# EAGLE board GrapherBlanK7_production (EAGLE 5.10)
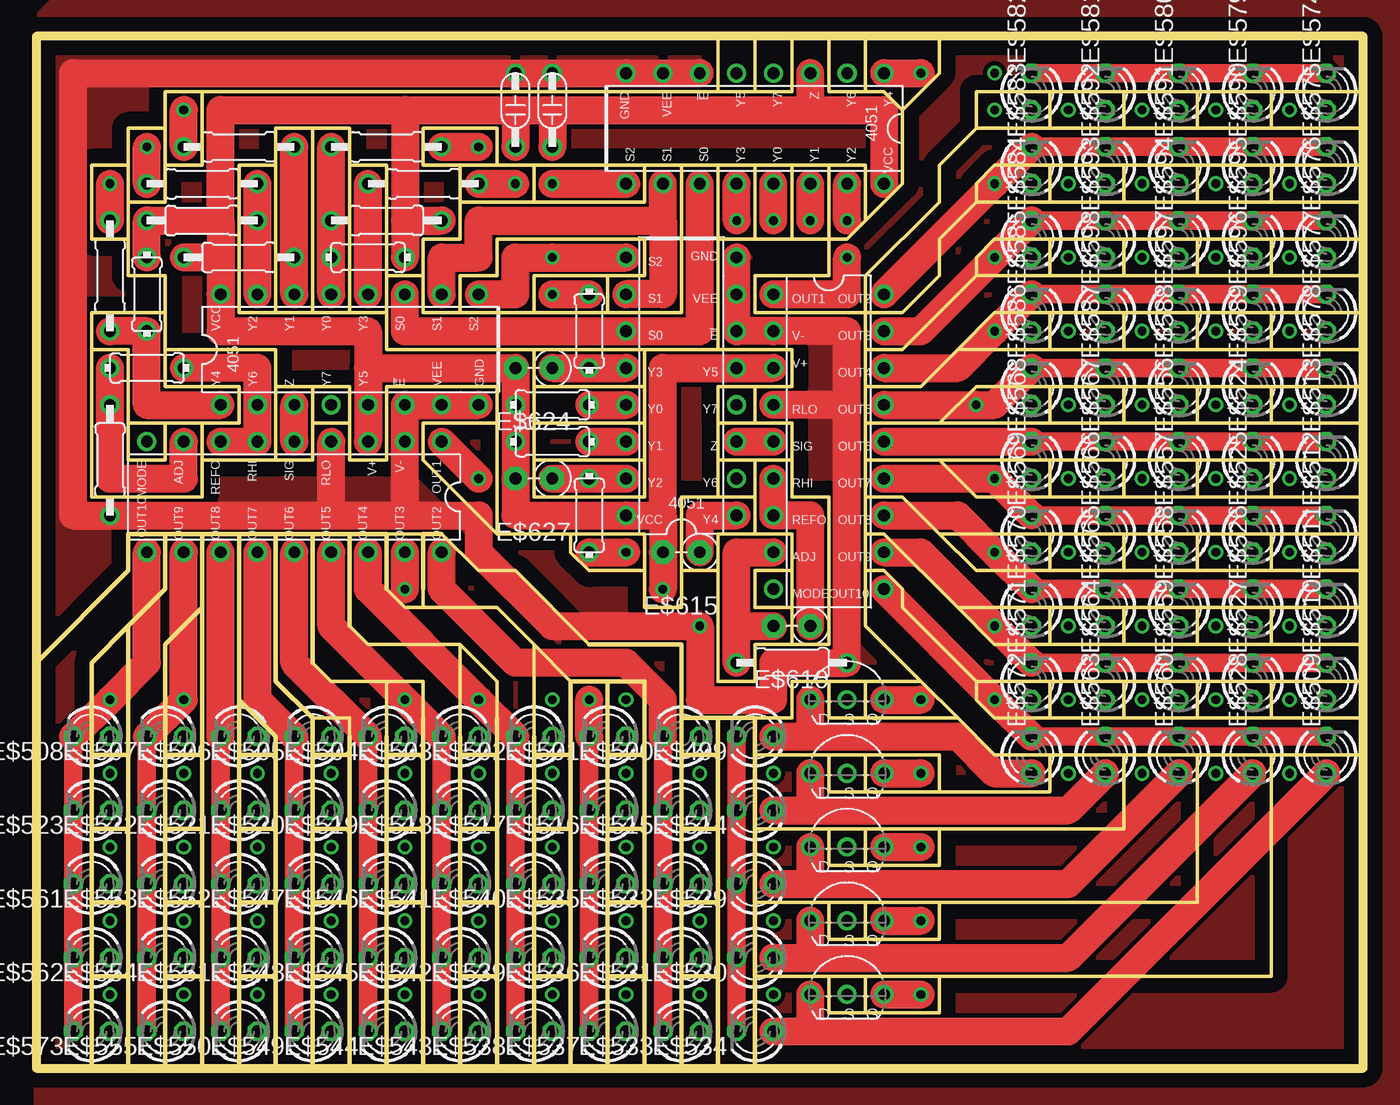
[diagram p0: board, top side]
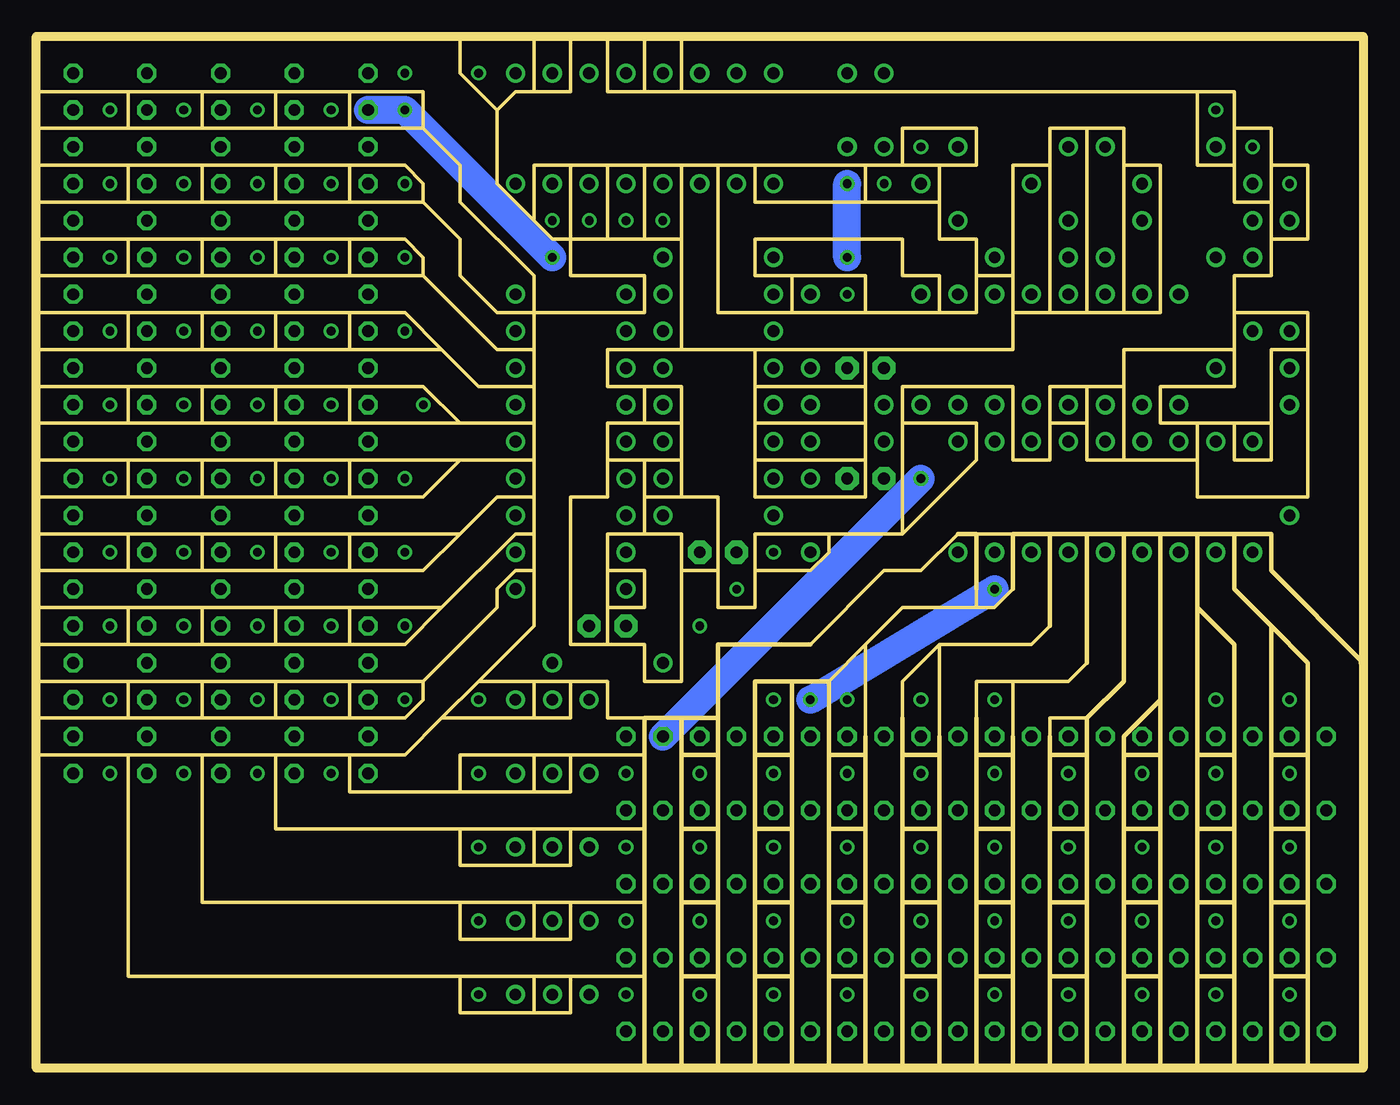
[diagram p1: board, bottom side, seen from below]

Size 91.44 x 71.12 mm. Coordinates in mm from the lower left corner, seen from the top.
Outline: 91.44,21.59 91.44,0 49.53,0
Outline: 91.44,21.59 91.44,24.13
Outline: 91.44,24.13 91.44,26.67
Outline: 91.44,26.67 91.44,29.21
Outline: 91.44,29.21 91.44,31.75
Outline: 91.44,31.75 91.44,34.29
Outline: 91.44,34.29 91.44,36.83
Outline: 91.44,36.83 91.44,39.37
Outline: 91.44,39.37 91.44,41.91
Outline: 91.44,41.91 91.44,44.45
Outline: 91.44,44.45 91.44,46.99
Outline: 91.44,46.99 91.44,49.53
Outline: 91.44,49.53 91.44,52.07
Outline: 91.44,52.07 91.44,54.61
Outline: 91.44,54.61 91.44,57.15
Outline: 91.44,57.15 91.44,59.69
Outline: 91.44,59.69 91.44,62.23
Outline: 91.44,62.23 91.44,64.77
Outline: 91.44,64.77 91.44,67.31
Outline: 91.44,67.31 91.44,71.12 62.23,71.12
Outline: 62.23,71.12 57.15,71.12
Outline: 57.15,71.12 54.61,71.12
Outline: 54.61,71.12 52.07,71.12
Outline: 52.07,71.12 49.53,71.12
Outline: 49.53,71.12 46.99,71.12
Outline: 46.99,71.12 0,71.12 0,27.94
Outline: 0,27.94 0,0 3.81,0
Outline: 3.81,0 6.35,0
Outline: 6.35,0 8.89,0
Outline: 8.89,0 11.43,0
Outline: 11.43,0 13.97,0
Outline: 13.97,0 16.51,0
Outline: 16.51,0 19.05,0
Outline: 19.05,0 21.59,0
Outline: 21.59,0 24.13,0
Outline: 24.13,0 26.67,0
Outline: 26.67,0 29.21,0
Outline: 29.21,0 31.75,0
Outline: 31.75,0 34.29,0
Outline: 34.29,0 36.83,0
Outline: 36.83,0 39.37,0
Outline: 39.37,0 41.91,0
Outline: 41.91,0 44.45,0
Outline: 44.45,0 46.99,0
Outline: 46.99,0 49.53,0
Outline: 3.81,0 3.81,6.35
Outline: 3.81,6.35 3.81,11.43
Outline: 3.81,11.43 3.81,16.51
Outline: 3.81,16.51 3.81,21.59
Outline: 3.81,21.59 3.81,27.94 6.35,30.48
Outline: 6.35,30.48 8.89,33.02 8.89,36.83
Outline: 8.89,36.83 6.35,36.83 6.35,34.29 0,27.94
Outline: 8.89,36.83 11.43,36.83
Outline: 11.43,36.83 11.43,31.75
Outline: 11.43,31.75 8.89,29.21 8.89,21.59
Outline: 8.89,21.59 8.89,16.51
Outline: 8.89,16.51 8.89,11.43
Outline: 8.89,11.43 8.89,6.35
Outline: 8.89,6.35 8.89,0
Outline: 6.35,0 6.35,6.35
Outline: 6.35,6.35 6.35,11.43
Outline: 6.35,11.43 6.35,16.51
Outline: 6.35,16.51 6.35,21.59
Outline: 6.35,21.59 6.35,30.48
Outline: 11.43,0 11.43,6.35
Outline: 11.43,6.35 11.43,11.43
Outline: 11.43,11.43 11.43,16.51
Outline: 11.43,16.51 11.43,21.59
Outline: 11.43,21.59 11.43,31.75
Outline: 13.97,0 13.97,6.35
Outline: 13.97,6.35 13.97,11.43
Outline: 13.97,11.43 13.97,16.51
Outline: 13.97,16.51 13.97,21.59
Outline: 13.97,21.59 13.97,25.4
Outline: 13.97,25.4 13.97,36.83
Outline: 13.97,36.83 11.43,36.83
Outline: 13.97,36.83 16.51,36.83
Outline: 16.51,36.83 16.51,26.67 19.05,24.13
Outline: 19.05,24.13 19.05,21.59
Outline: 19.05,21.59 19.05,16.51
Outline: 19.05,16.51 19.05,11.43
Outline: 19.05,11.43 19.05,6.35
Outline: 19.05,6.35 19.05,0
Outline: 16.51,0 16.51,6.35
Outline: 16.51,6.35 16.51,11.43
Outline: 16.51,11.43 16.51,16.51
Outline: 16.51,16.51 16.51,21.59
Outline: 16.51,21.59 16.51,22.86 13.97,25.4
Outline: 21.59,0 21.59,6.35
Outline: 21.59,6.35 21.59,11.43
Outline: 21.59,11.43 21.59,16.51
Outline: 21.59,16.51 21.59,21.59
Outline: 21.59,21.59 21.59,22.86 21.59,24.13 19.05,24.13
Outline: 24.13,0 24.13,6.35
Outline: 24.13,6.35 24.13,11.43
Outline: 24.13,11.43 24.13,16.51
Outline: 24.13,16.51 24.13,21.59
Outline: 24.13,21.59 24.13,22.86 24.13,26.67
Outline: 19.05,36.83 19.05,27.94 20.32,26.67 24.13,26.67
Outline: 19.05,36.83 16.51,36.83
Outline: 26.67,0 26.67,6.35
Outline: 26.67,6.35 26.67,11.43
Outline: 26.67,11.43 26.67,16.51
Outline: 26.67,16.51 26.67,21.59
Outline: 26.67,21.59 26.67,24.13 26.67,26.67 24.13,26.67
Outline: 29.21,0 29.21,6.35
Outline: 29.21,6.35 29.21,11.43
Outline: 29.21,11.43 29.21,16.51
Outline: 29.21,16.51 29.21,21.59
Outline: 29.21,21.59 29.21,22.86 29.21,29.21
Outline: 21.59,36.83 21.59,30.48 22.86,29.21 29.21,29.21
Outline: 21.59,36.83 19.05,36.83
Outline: 6.35,21.59 3.81,21.59
Outline: 6.35,16.51 3.81,16.51
Outline: 6.35,11.43 3.81,11.43
Outline: 6.35,6.35 3.81,6.35
Outline: 11.43,6.35 8.89,6.35
Outline: 11.43,11.43 8.89,11.43
Outline: 11.43,16.51 8.89,16.51
Outline: 11.43,21.59 8.89,21.59
Outline: 16.51,6.35 13.97,6.35
Outline: 16.51,11.43 13.97,11.43
Outline: 16.51,16.51 13.97,16.51
Outline: 16.51,21.59 13.97,21.59
Outline: 21.59,6.35 19.05,6.35
Outline: 21.59,11.43 19.05,11.43
Outline: 21.59,16.51 19.05,16.51
Outline: 21.59,21.59 19.05,21.59
Outline: 26.67,6.35 24.13,6.35
Outline: 26.67,11.43 24.13,11.43
Outline: 26.67,16.51 24.13,16.51
Outline: 26.67,21.59 24.13,21.59
Outline: 31.75,0 31.75,6.35
Outline: 31.75,6.35 31.75,11.43
Outline: 31.75,11.43 31.75,16.51
Outline: 31.75,16.51 31.75,21.59
Outline: 31.75,21.59 31.75,24.13 31.75,26.67 29.21,29.21
Outline: 34.29,0 34.29,6.35
Outline: 34.29,6.35 34.29,11.43
Outline: 34.29,11.43 34.29,16.51
Outline: 34.29,16.51 34.29,21.59
Outline: 34.29,21.59 34.29,22.86 34.29,29.21
Outline: 24.13,36.83 24.13,33.02 25.4,31.75 26.67,31.75
Outline: 24.13,36.83 21.59,36.83
Outline: 29.21,21.59 31.75,21.59
Outline: 29.21,16.51 31.75,16.51
Outline: 31.75,11.43 29.21,11.43
Outline: 31.75,6.35 29.21,6.35
Outline: 36.83,0 36.83,6.35
Outline: 36.83,6.35 36.83,11.43
Outline: 36.83,11.43 36.83,16.51
Outline: 36.83,16.51 36.83,21.59
Outline: 36.83,21.59 36.83,26.67
Outline: 36.83,26.67 39.37,26.67
Outline: 39.37,26.67 39.37,21.59
Outline: 39.37,21.59 39.37,16.51
Outline: 39.37,16.51 39.37,11.43
Outline: 39.37,11.43 39.37,6.35
Outline: 39.37,6.35 39.37,0
Outline: 44.45,0 44.45,6.35
Outline: 44.45,6.35 44.45,11.43
Outline: 44.45,11.43 44.45,16.51
Outline: 44.45,16.51 44.45,21.59
Outline: 44.45,21.59 44.45,24.13
Outline: 44.45,24.13 44.45,29.21 38.1,29.21 33.02,34.29 30.48,34.29 27.94,36.83 26.67,36.83
Outline: 26.67,36.83 26.67,33.02 26.67,31.75
Outline: 39.37,26.67 41.91,26.67 41.91,21.59
Outline: 41.91,21.59 41.91,16.51
Outline: 41.91,16.51 41.91,11.43
Outline: 41.91,11.43 41.91,6.35
Outline: 41.91,6.35 41.91,0
Outline: 46.99,0 46.99,6.35
Outline: 46.99,6.35 46.99,11.43
Outline: 46.99,11.43 46.99,16.51
Outline: 46.99,16.51 46.99,21.59
Outline: 46.99,21.59 46.99,24.13
Outline: 46.99,24.13 49.53,24.13
Outline: 49.53,24.13 49.53,21.59
Outline: 49.53,21.59 49.53,16.51
Outline: 49.53,16.51 49.53,11.43
Outline: 49.53,11.43 49.53,6.35
Outline: 49.53,6.35 49.53,0
Outline: 46.99,24.13 44.45,24.13
Outline: 34.29,21.59 36.83,21.59
Outline: 34.29,16.51 36.83,16.51
Outline: 34.29,11.43 36.83,11.43
Outline: 34.29,6.35 36.83,6.35
Outline: 39.37,6.35 41.91,6.35
Outline: 39.37,11.43 41.91,11.43
Outline: 39.37,16.51 41.91,16.51
Outline: 39.37,21.59 41.91,21.59
Outline: 44.45,6.35 46.99,6.35
Outline: 44.45,11.43 46.99,11.43
Outline: 44.45,16.51 46.99,16.51
Outline: 44.45,21.59 46.99,21.59
Outline: 3.81,49.53 6.35,49.53 6.35,44.45
Outline: 6.35,44.45 6.35,41.91 8.89,41.91 8.89,44.45
Outline: 8.89,44.45 11.43,44.45
Outline: 11.43,44.45 11.43,41.91
Outline: 11.43,41.91 11.43,39.37 3.81,39.37 3.81,49.53
Outline: 3.81,49.53 3.81,52.07 8.89,52.07
Outline: 8.89,52.07 8.89,49.53
Outline: 8.89,49.53 8.89,46.99 13.97,46.99 13.97,44.45 11.43,44.45
Outline: 8.89,44.45 6.35,44.45
Outline: 11.43,41.91 16.51,41.91
Outline: 16.51,41.91 16.51,46.99
Outline: 16.51,46.99 16.51,49.53 8.89,49.53
Outline: 16.51,46.99 19.05,46.99
Outline: 19.05,46.99 19.05,44.45
Outline: 19.05,44.45 19.05,41.91 16.51,41.91
Outline: 19.05,44.45 21.59,44.45
Outline: 21.59,44.45 21.59,46.99 19.05,46.99
Outline: 6.35,59.69 8.89,59.69 8.89,62.23
Outline: 8.89,62.23 11.43,62.23 11.43,67.31
Outline: 11.43,67.31 46.99,67.31
Outline: 46.99,67.31 49.53,67.31
Outline: 49.53,67.31 52.07,67.31 52.07,71.12
Outline: 54.61,71.12 54.61,67.31 57.15,67.31
Outline: 57.15,67.31 58.42,67.31 59.69,66.04
Outline: 59.69,66.04 59.69,60.96 57.15,58.42
Outline: 54.61,62.23 57.15,62.23 57.15,58.42
Outline: 54.61,62.23 52.07,62.23
Outline: 52.07,62.23 49.53,62.23
Outline: 49.53,62.23 46.99,62.23
Outline: 34.29,62.23 31.75,62.23
Outline: 31.75,62.23 31.75,64.77 26.67,64.77 26.67,62.23 29.21,62.23
Outline: 29.21,62.23 29.21,59.69
Outline: 29.21,59.69 29.21,57.15 26.67,57.15 26.67,54.61
Outline: 26.67,54.61 24.13,54.61
Outline: 24.13,54.61 24.13,62.23 21.59,62.23
Outline: 19.05,64.77 21.59,64.77 21.59,62.23
Outline: 19.05,64.77 16.51,64.77 16.51,62.23
Outline: 16.51,52.07 13.97,52.07 13.97,62.23 16.51,62.23
Outline: 16.51,52.07 19.05,52.07
Outline: 19.05,52.07 21.59,52.07
Outline: 21.59,52.07 24.13,52.07
Outline: 24.13,52.07 24.13,49.53 34.29,49.53
Outline: 34.29,49.53 41.91,49.53
Outline: 41.91,49.53 46.99,49.53
Outline: 46.99,49.53 46.99,57.15
Outline: 46.99,57.15 46.99,62.23
Outline: 46.99,62.23 44.45,62.23
Outline: 44.45,62.23 44.45,52.07 39.37,52.07
Outline: 39.37,52.07 34.29,52.07
Outline: 34.29,52.07 29.21,52.07
Outline: 29.21,52.07 26.67,52.07 26.67,54.61
Outline: 24.13,52.07 24.13,54.61
Outline: 16.51,62.23 16.51,52.07
Outline: 19.05,52.07 19.05,64.77
Outline: 21.59,62.23 21.59,52.07
Outline: 31.75,62.23 29.21,62.23
Outline: 29.21,59.69 34.29,59.69
Outline: 34.29,59.69 34.29,62.23
Outline: 41.91,62.23 41.91,59.69 34.29,59.69
Outline: 41.91,62.23 34.29,62.23
Outline: 29.21,52.07 29.21,54.61 31.75,54.61 31.75,57.15 41.91,57.15 41.91,54.61 39.37,54.61
Outline: 34.29,52.07 34.29,54.61 39.37,54.61
Outline: 39.37,54.61 39.37,52.07
Outline: 44.45,62.23 41.91,62.23
Outline: 54.61,57.15 55.88,57.15 57.15,58.42
Outline: 54.61,57.15 54.61,62.23
Outline: 54.61,57.15 52.07,57.15
Outline: 52.07,57.15 52.07,62.23
Outline: 52.07,57.15 49.53,57.15
Outline: 49.53,57.15 49.53,62.23
Outline: 49.53,57.15 46.99,57.15
Outline: 54.61,57.15 54.61,54.61 49.53,54.61 49.53,52.07 57.15,52.07
Outline: 57.15,52.07 57.15,54.61 62.23,59.69 62.23,62.23 64.77,64.77
Outline: 46.99,49.53 52.07,49.53 52.07,46.99 49.53,46.99
Outline: 49.53,46.99 46.99,46.99 46.99,44.45
Outline: 44.45,34.29 44.45,39.37 46.99,39.37
Outline: 44.45,34.29 44.45,31.75 41.91,31.75 41.91,34.29
Outline: 41.91,34.29 41.91,36.83 36.83,36.83
Outline: 36.83,36.83 31.75,36.83
Outline: 31.75,44.45 31.75,46.99 24.13,46.99 24.13,41.91 21.59,41.91 21.59,44.45
Outline: 6.35,59.69 6.35,57.15
Outline: 6.35,57.15 6.35,54.61 8.89,54.61 8.89,52.07
Outline: 11.43,67.31 8.89,67.31 8.89,64.77
Outline: 8.89,64.77 8.89,62.23
Outline: 8.89,64.77 6.35,64.77 6.35,62.23
Outline: 6.35,62.23 6.35,59.69
Outline: 6.35,62.23 3.81,62.23 3.81,57.15 6.35,57.15
Outline: 41.91,34.29 38.1,34.29 36.83,35.56 36.83,36.83
Outline: 31.75,44.45 26.67,44.45 26.67,41.91 31.75,36.83
Outline: 41.91,41.91 41.91,39.37 34.29,39.37 34.29,41.91
Outline: 41.91,41.91 41.91,44.45
Outline: 41.91,44.45 41.91,46.99
Outline: 41.91,46.99 41.91,49.53
Outline: 34.29,41.91 34.29,44.45
Outline: 34.29,44.45 34.29,46.99
Outline: 34.29,46.99 34.29,49.53
Outline: 34.29,46.99 41.91,46.99
Outline: 41.91,44.45 34.29,44.45
Outline: 34.29,41.91 41.91,41.91
Outline: 62.23,71.12 62.23,68.58 59.69,66.04
Outline: 57.15,71.12 57.15,67.31
Outline: 52.07,29.21 49.53,29.21 49.53,26.67 46.99,26.67 46.99,34.29
Outline: 52.07,29.21 52.07,31.75
Outline: 52.07,31.75 49.53,31.75 49.53,34.29 52.07,34.29
Outline: 52.07,34.29 52.07,36.83 49.53,36.83
Outline: 49.53,36.83 46.99,36.83 46.99,34.29
Outline: 46.99,34.29 44.45,34.29
Outline: 46.99,39.37 49.53,39.37
Outline: 49.53,39.37 49.53,36.83
Outline: 49.53,39.37 49.53,41.91
Outline: 49.53,41.91 52.07,41.91
Outline: 52.07,41.91 52.07,39.37 54.61,39.37 54.61,29.21 52.07,29.21
Outline: 52.07,41.91 52.07,44.45 49.53,44.45
Outline: 49.53,44.45 46.99,44.45
Outline: 46.99,44.45 46.99,41.91
Outline: 46.99,41.91 49.53,41.91
Outline: 46.99,41.91 46.99,39.37
Outline: 49.53,44.45 49.53,46.99
Outline: 52.07,31.75 52.07,34.29
Outline: 49.53,24.13 52.07,24.13 52.07,26.67 54.61,26.67
Outline: 54.61,26.67 54.61,24.13 57.15,24.13
Outline: 57.15,24.13 57.15,26.67
Outline: 57.15,26.67 54.61,26.67
Outline: 57.15,24.13 63.5,24.13
Outline: 63.5,24.13 60.96,26.67
Outline: 60.96,26.67 57.15,26.67
Outline: 49.53,21.59 54.61,21.59
Outline: 54.61,21.59 57.15,21.59
Outline: 57.15,21.59 62.23,21.59 62.23,19.05
Outline: 62.23,19.05 57.15,19.05
Outline: 57.15,19.05 57.15,21.59
Outline: 54.61,21.59 54.61,19.05 57.15,19.05
Outline: 49.53,16.51 54.61,16.51
Outline: 54.61,16.51 57.15,16.51
Outline: 57.15,16.51 62.23,16.51
Outline: 62.23,16.51 74.93,16.51 74.93,21.59
Outline: 74.93,21.59 69.85,21.59
Outline: 69.85,21.59 69.85,19.05 62.23,19.05
Outline: 49.53,71.12 49.53,67.31
Outline: 46.99,71.12 46.99,67.31
Outline: 54.61,6.35 54.61,3.81 57.15,3.81
Outline: 57.15,3.81 57.15,6.35
Outline: 57.15,6.35 54.61,6.35
Outline: 54.61,16.51 54.61,13.97 57.15,13.97
Outline: 57.15,13.97 57.15,16.51
Outline: 54.61,11.43 54.61,8.89 57.15,8.89
Outline: 57.15,8.89 57.15,11.43
Outline: 49.53,11.43 57.15,11.43
Outline: 57.15,11.43 62.23,11.43
Outline: 62.23,11.43 80.01,11.43 80.01,21.59
Outline: 80.01,21.59 74.93,21.59
Outline: 57.15,13.97 62.23,13.97 62.23,16.51
Outline: 57.15,8.89 62.23,8.89 62.23,11.43
Outline: 57.15,3.81 62.23,3.81 62.23,6.35
Outline: 62.23,6.35 57.15,6.35
Outline: 63.5,24.13 66.04,21.59 69.85,21.59
Outline: 60.96,26.67 57.15,30.48 57.15,34.29
Outline: 57.15,34.29 58.42,34.29 59.69,33.02 59.69,31.75 64.77,26.67
Outline: 80.01,21.59 85.09,21.59
Outline: 85.09,21.59 91.44,21.59
Outline: 91.44,24.13 85.09,24.13
Outline: 85.09,24.13 80.01,24.13
Outline: 80.01,24.13 74.93,24.13
Outline: 74.93,24.13 69.85,24.13
Outline: 62.23,6.35 85.09,6.35 85.09,21.59
Outline: 24.13,36.83 26.67,36.83
Outline: 57.15,34.29 57.15,36.83
Outline: 57.15,36.83 58.42,36.83 63.5,31.75
Outline: 63.5,31.75 66.04,29.21 69.85,29.21
Outline: 57.15,36.83 57.15,39.37
Outline: 57.15,39.37 59.69,39.37 62.23,36.83
Outline: 62.23,36.83 64.77,34.29 69.85,34.29
Outline: 57.15,39.37 57.15,41.91
Outline: 57.15,41.91 62.23,41.91
Outline: 62.23,41.91 64.77,39.37 69.85,39.37
Outline: 57.15,41.91 57.15,44.45
Outline: 57.15,44.45 62.23,44.45
Outline: 57.15,44.45 57.15,46.99
Outline: 57.15,46.99 60.96,46.99 63.5,49.53
Outline: 57.15,46.99 57.15,49.53
Outline: 57.15,49.53 59.69,49.53 64.77,54.61
Outline: 57.15,49.53 57.15,52.07
Outline: 64.77,64.77 69.85,64.77
Outline: 69.85,64.77 74.93,64.77
Outline: 74.93,64.77 80.01,64.77
Outline: 80.01,64.77 85.09,64.77
Outline: 85.09,64.77 91.44,64.77
Outline: 64.77,59.69 64.77,60.96 66.04,62.23 69.85,62.23
Outline: 69.85,62.23 74.93,62.23
Outline: 74.93,62.23 80.01,62.23
Outline: 80.01,62.23 85.09,62.23
Outline: 85.09,62.23 91.44,62.23
Outline: 64.77,54.61 64.77,55.88 66.04,57.15 69.85,57.15
Outline: 69.85,57.15 74.93,57.15
Outline: 74.93,57.15 80.01,57.15
Outline: 80.01,57.15 85.09,57.15
Outline: 85.09,57.15 91.44,57.15
Outline: 64.77,59.69 69.85,59.69
Outline: 69.85,59.69 74.93,59.69
Outline: 74.93,59.69 80.01,59.69
Outline: 80.01,59.69 85.09,59.69
Outline: 85.09,59.69 91.44,59.69
Outline: 63.5,49.53 69.85,49.53
Outline: 69.85,49.53 74.93,49.53
Outline: 74.93,49.53 80.01,49.53
Outline: 80.01,49.53 85.09,49.53
Outline: 85.09,49.53 91.44,49.53
Outline: 91.44,52.07 85.09,52.07
Outline: 85.09,52.07 80.01,52.07
Outline: 80.01,52.07 74.93,52.07
Outline: 74.93,52.07 69.85,52.07
Outline: 69.85,62.23 69.85,59.69
Outline: 74.93,62.23 74.93,59.69
Outline: 80.01,62.23 80.01,59.69
Outline: 85.09,62.23 85.09,59.69
Outline: 69.85,67.31 64.77,67.31 64.77,64.77
Outline: 69.85,67.31 74.93,67.31
Outline: 74.93,67.31 80.01,67.31
Outline: 80.01,67.31 85.09,67.31
Outline: 85.09,67.31 91.44,67.31
Outline: 69.85,64.77 69.85,67.31
Outline: 74.93,64.77 74.93,67.31
Outline: 80.01,64.77 80.01,67.31
Outline: 85.09,64.77 85.09,67.31
Outline: 64.77,54.61 69.85,54.61
Outline: 69.85,54.61 74.93,54.61
Outline: 74.93,54.61 80.01,54.61
Outline: 80.01,54.61 85.09,54.61
Outline: 85.09,54.61 91.44,54.61
Outline: 69.85,54.61 69.85,57.15
Outline: 74.93,54.61 74.93,57.15
Outline: 80.01,54.61 80.01,57.15
Outline: 85.09,54.61 85.09,57.15
Outline: 69.85,52.07 66.04,52.07 63.5,49.53
Outline: 69.85,52.07 69.85,49.53
Outline: 74.93,52.07 74.93,49.53
Outline: 80.01,52.07 80.01,49.53
Outline: 85.09,52.07 85.09,49.53
Outline: 62.23,44.45 64.77,46.99 69.85,46.99
Outline: 69.85,46.99 74.93,46.99
Outline: 74.93,46.99 80.01,46.99
Outline: 80.01,46.99 85.09,46.99
Outline: 85.09,46.99 91.44,46.99
Outline: 62.23,44.45 69.85,44.45
Outline: 69.85,44.45 74.93,44.45
Outline: 74.93,44.45 80.01,44.45
Outline: 80.01,44.45 85.09,44.45
Outline: 85.09,44.45 91.44,44.45
Outline: 69.85,44.45 69.85,46.99
Outline: 74.93,44.45 74.93,46.99
Outline: 80.01,44.45 80.01,46.99
Outline: 85.09,44.45 85.09,46.99
Outline: 62.23,41.91 69.85,41.91
Outline: 69.85,41.91 74.93,41.91
Outline: 74.93,41.91 80.01,41.91
Outline: 80.01,41.91 85.09,41.91
Outline: 85.09,41.91 91.44,41.91
Outline: 69.85,39.37 74.93,39.37
Outline: 74.93,39.37 80.01,39.37
Outline: 80.01,39.37 85.09,39.37
Outline: 85.09,39.37 91.44,39.37
Outline: 69.85,39.37 69.85,41.91
Outline: 74.93,39.37 74.93,41.91
Outline: 80.01,39.37 80.01,41.91
Outline: 85.09,39.37 85.09,41.91
Outline: 69.85,34.29 74.93,34.29
Outline: 74.93,34.29 80.01,34.29
Outline: 80.01,34.29 85.09,34.29
Outline: 85.09,34.29 91.44,34.29
Outline: 62.23,36.83 69.85,36.83
Outline: 69.85,36.83 74.93,36.83
Outline: 74.93,36.83 80.01,36.83
Outline: 80.01,36.83 85.09,36.83
Outline: 85.09,36.83 91.44,36.83
Outline: 69.85,36.83 69.85,34.29
Outline: 74.93,36.83 74.93,34.29
Outline: 80.01,36.83 80.01,34.29
Outline: 85.09,36.83 85.09,34.29
Outline: 63.5,31.75 69.85,31.75
Outline: 69.85,31.75 74.93,31.75
Outline: 74.93,31.75 80.01,31.75
Outline: 80.01,31.75 85.09,31.75
Outline: 85.09,31.75 91.44,31.75
Outline: 69.85,29.21 74.93,29.21
Outline: 74.93,29.21 80.01,29.21
Outline: 80.01,29.21 85.09,29.21
Outline: 85.09,29.21 91.44,29.21
Outline: 69.85,29.21 69.85,31.75
Outline: 74.93,29.21 74.93,31.75
Outline: 80.01,29.21 80.01,31.75
Outline: 85.09,29.21 85.09,31.75
Outline: 69.85,26.67 74.93,26.67
Outline: 74.93,26.67 80.01,26.67
Outline: 80.01,26.67 85.09,26.67
Outline: 85.09,26.67 91.44,26.67
Outline: 69.85,26.67 69.85,24.13
Outline: 74.93,26.67 74.93,24.13
Outline: 80.01,26.67 80.01,24.13
Outline: 85.09,26.67 85.09,24.13
Outline: 54.61,6.35 49.53,6.35
Outline: 26.67,31.75 31.75,31.75 34.29,29.21
Outline: 57.15,52.07 59.69,52.07 62.23,54.61 62.23,57.15 64.77,59.69
Outline: 69.85,24.13 66.04,24.13 64.77,25.4 64.77,26.67
Outline: 64.77,26.67 69.85,26.67
Outline: 36.83,26.67 34.29,29.21
Outline: 31.75,36.83 31.75,44.45
Copper layers (1*16): Top 0.035mm / dielectric 1.5mm / Bottom 0.035mm
Design rules "default": minimum track width 10mil, minimum drill 24mil, track to track 8mil, track to pad 8mil, pad to pad 8mil, via to via 8mil, smd to smd 8mil, copper to edge 40mil, drill to drill 8mil, minimum pad ring 10mil, minimum via ring 8mil, stop-mask expansion 4mil, vias tented up to drill 0mil, thermal gap 10mil
Milling: 1 lines

## Footprints (pad centres in the part's own frame; a part is rotated, then mirrored left to right if it is on the bottom)
RESISTOR-S2 = drill 0.813 round: IN1 -2.54,0; IN2 2.54,0
SMALL-CAPACITOR = drill 0.813 round: IN1 0,0; IN2 5.08,0
LED3MM = drill 0.813 octagon: A -1.27,0; K 1.27,0
LM3914-10LED-BARGRAPH = drill 0.813 round: 1!R -3.81,1.27; 1!S -3.81,3.81; 1Q 3.81,1.27; 2!R -3.81,-3.81; 2!S -3.81,-6.35; 2Q 3.81,-8.89; 2Q1 3.81,-11.43; 2Q3 -3.81,-11.43; 3!R 3.81,-1.27; 3!S 3.81,-3.81; 3Q 3.81,-6.35; 4!R 3.81,3.81; 4!S 3.81,6.35; 4Q -3.81,8.89; GND -3.81,-8.89; NC -3.81,6.35; OE -3.81,-1.27; VCC 3.81,8.89
4051-ANALOG-MUX = drill 0.813 round: CLOCK 3.81,-6.35; GND -3.81,-8.89; Q0 3.81,-8.89; Q1 -3.81,-6.35; Q2 -3.81,-3.81; Q3 -3.81,-1.27; Q4 -3.81,3.81; Q5 -3.81,6.35; Q6 -3.81,1.27; Q7 3.81,1.27; Q8 3.81,-1.27; Q9 3.81,3.81; Q10 3.81,6.35; Q11 -3.81,8.89; RESET 3.81,-3.81; VCC 3.81,8.89
RESISTOR = drill 0.813 round: IN1 -3.81,0; IN2 3.81,0
RS-2,5 = drill 0.813 pad 1.6 octagon: 1 -1.27,0; 2 1.27,0
TRANSISTOR = drill 0.8 round: P$1 0,0; P$2 2.54,0; P$3 -2.54,0

## Placement (x,y rotation side)
E$1  [RESISTOR-S2]  38.1,38.1 90 top
E$2  [RESISTOR-S2]  35.56,45.72 180 top
E$3  [RESISTOR-S2]  35.56,43.18 180 top
E$5  [SMALL-CAPACITOR]  35.56,63.5 90 top
E$6  [SMALL-CAPACITOR]  33.02,63.5 90 top
E$499  [LED3MM]  49.53,22.86 180 top
E$500  [LED3MM]  44.45,22.86 180 top
E$501  [LED3MM]  39.37,22.86 180 top
E$502  [LED3MM]  34.29,22.86 180 top
E$503  [LED3MM]  29.21,22.86 180 top
E$504  [LED3MM]  24.13,22.86 180 top
E$505  [LED3MM]  19.05,22.86 180 top
E$506  [LED3MM]  13.97,22.86 180 top
E$507  [LED3MM]  8.89,22.86 180 top
E$508  [LED3MM]  3.81,22.86 180 top
E$509  [LED3MM]  88.9,21.59 90 top
E$510  [LED3MM]  88.9,26.67 90 top
E$511  [LED3MM]  88.9,31.75 90 top
E$512  [LED3MM]  88.9,36.83 90 top
E$513  [LED3MM]  88.9,41.91 90 top
E$514  [LED3MM]  49.53,17.78 180 top
E$515  [LED3MM]  44.45,17.78 180 top
E$516  [LED3MM]  39.37,17.78 180 top
E$517  [LED3MM]  34.29,17.78 180 top
E$518  [LED3MM]  29.21,17.78 180 top
E$519  [LED3MM]  24.13,17.78 180 top
E$520  [LED3MM]  19.05,17.78 180 top
E$521  [LED3MM]  13.97,17.78 180 top
E$522  [LED3MM]  8.89,17.78 180 top
E$523  [LED3MM]  3.81,17.78 180 top
E$524  [LED3MM]  83.82,41.91 90 top
E$525  [LED3MM]  83.82,36.83 90 top
E$526  [LED3MM]  83.82,31.75 90 top
E$527  [LED3MM]  83.82,26.67 90 top
E$528  [LED3MM]  83.82,21.59 90 top
E$529  [LED3MM]  49.53,12.7 180 top
E$530  [LED3MM]  49.53,7.62 180 top
E$531  [LED3MM]  44.45,7.62 180 top
E$532  [LED3MM]  44.45,12.7 180 top
E$533  [LED3MM]  44.45,2.54 180 top
E$534  [LED3MM]  49.53,2.54 180 top
E$535  [LED3MM]  39.37,12.7 180 top
E$536  [LED3MM]  39.37,7.62 180 top
E$537  [LED3MM]  39.37,2.54 180 top
E$538  [LED3MM]  34.29,2.54 180 top
E$539  [LED3MM]  34.29,7.62 180 top
E$540  [LED3MM]  34.29,12.7 180 top
E$541  [LED3MM]  29.21,12.7 180 top
E$542  [LED3MM]  29.21,7.62 180 top
E$543  [LED3MM]  29.21,2.54 180 top
E$544  [LED3MM]  24.13,2.54 180 top
E$545  [LED3MM]  24.13,7.62 180 top
E$546  [LED3MM]  24.13,12.7 180 top
E$547  [LED3MM]  19.05,12.7 180 top
E$548  [LED3MM]  19.05,7.62 180 top
E$549  [LED3MM]  19.05,2.54 180 top
E$550  [LED3MM]  13.97,2.54 180 top
E$551  [LED3MM]  13.97,7.62 180 top
E$552  [LED3MM]  13.97,12.7 180 top
E$553  [LED3MM]  8.89,12.7 180 top
E$554  [LED3MM]  8.89,7.62 180 top
E$555  [LED3MM]  8.89,2.54 180 top
E$556  [LED3MM]  78.74,41.91 90 top
E$557  [LED3MM]  78.74,36.83 90 top
E$558  [LED3MM]  78.74,31.75 90 top
E$559  [LED3MM]  78.74,26.67 90 top
E$560  [LED3MM]  78.74,21.59 90 top
E$561  [LED3MM]  3.81,12.7 180 top
E$562  [LED3MM]  3.81,7.62 180 top
E$563  [LED3MM]  73.66,21.59 90 top
E$564  [LED3MM]  73.66,26.67 90 top
E$565  [LED3MM]  73.66,31.75 90 top
E$566  [LED3MM]  73.66,36.83 90 top
E$567  [LED3MM]  73.66,41.91 90 top
E$568  [LED3MM]  68.58,41.91 90 top
E$569  [LED3MM]  68.58,36.83 90 top
E$570  [LED3MM]  68.58,31.75 90 top
E$571  [LED3MM]  68.58,26.67 90 top
E$572  [LED3MM]  68.58,21.59 90 top
E$573  [LED3MM]  3.81,2.54 180 top
E$574  [LED3MM]  88.9,67.31 90 top
E$575  [LED3MM]  88.9,62.23 90 top
E$576  [LED3MM]  88.9,57.15 90 top
E$577  [LED3MM]  88.9,52.07 90 top
E$578  [LED3MM]  88.9,46.99 90 top
E$579  [LED3MM]  83.82,67.31 90 top
E$580  [LED3MM]  78.74,67.31 90 top
E$581  [LED3MM]  73.66,67.31 90 top
E$582  [LED3MM]  68.58,67.31 90 top
E$583  [LED3MM]  68.58,62.23 90 top
E$584  [LED3MM]  68.58,57.15 90 top
E$585  [LED3MM]  68.58,52.07 90 top
E$586  [LED3MM]  68.58,46.99 90 top
E$587  [LED3MM]  73.66,46.99 90 top
E$588  [LED3MM]  78.74,46.99 90 top
E$589  [LED3MM]  83.82,46.99 90 top
E$590  [LED3MM]  83.82,62.23 90 top
E$591  [LED3MM]  78.74,62.23 90 top
E$592  [LED3MM]  73.66,62.23 90 top
E$593  [LED3MM]  73.66,57.15 90 top
E$594  [LED3MM]  78.74,57.15 90 top
E$595  [LED3MM]  83.82,57.15 90 top
E$596  [LED3MM]  83.82,52.07 90 top
E$597  [LED3MM]  78.74,52.07 90 top
E$598  [LED3MM]  73.66,52.07 90 top
E$599  [LM3914-10LED-BARGRAPH]  19.05,39.37 270 top
E$600  [4051-ANALOG-MUX]  21.59,49.53 90 top
E$601  [RESISTOR-S2]  7.62,48.26 0 top
E$602  [RESISTOR]  5.08,41.91 90 top
E$603  [RESISTOR]  13.97,63.5 180 top
E$604  [RESISTOR]  11.43,58.42 180 top
E$605  [RESISTOR]  13.97,55.88 180 top
E$606  [RESISTOR]  11.43,60.96 180 top
E$607  [RESISTOR]  24.13,58.42 180 top
E$609  [RESISTOR-S2]  22.86,55.88 0 top
E$610  [RS-2,5]  52.07,30.48 180 top
E$611  [RESISTOR]  5.08,54.61 90 top
E$613  [LM3914-10LED-BARGRAPH]  54.61,44.45 0 top
E$614  [4051-ANALOG-MUX]  44.45,46.99 180 top
E$615  [RS-2,5]  44.45,35.56 180 top
E$616  [RESISTOR]  52.07,27.94 0 top
E$617  [TRANSISTOR]  55.88,20.32 0 top
E$618  [TRANSISTOR]  55.88,25.4 0 top
E$619  [TRANSISTOR]  55.88,15.24 0 top
E$620  [TRANSISTOR]  55.88,10.16 0 top
E$621  [TRANSISTOR]  55.88,5.08 0 top
E$623  [4051-ANALOG-MUX]  49.53,64.77 270 top
E$624  [RS-2,5]  34.29,48.26 180 top
E$627  [RS-2,5]  34.29,40.64 180 top
E$628  [RESISTOR-S2]  38.1,50.8 90 top
E$629  [RESISTOR]  26.67,60.96 180 top
E$630  [RESISTOR]  24.13,63.5 180 top
E$631  [RESISTOR-S2]  7.62,53.34 90 top

## Library data of the parts
E$1-E$3 E$5 E$6 E$599-E$607 E$609 E$611 E$613 E$614 E$616-E$621 E$623 E$628-E$631 = RussellLibrary
E$499-E$598 = led
E$610 E$615 E$624 E$627 = discrete

## Nets
GND: E$599.1!R E$599.NC E$600.GND E$600.Q2 E$613.1!R E$613.NC E$614.GND E$614.Q2 E$616.IN2 E$623.GND E$623.Q2
S$3: E$613.4Q
S$4: E$501.K E$537.K E$599.4!S
S$193: E$613.OE E$614.Q4
S$194: E$613.2!R E$613.2!S
S$195: E$509.K E$572.K E$613.2Q1
S$196: E$613.GND E$616.IN1
S$198: E$504.K E$544.K E$599.3!R
S$199: E$505.K E$549.K E$599.3!S
S$200: E$506.K E$550.K E$599.3Q
S$201: E$507.K E$555.K E$599.2Q
S$202: E$508.K E$573.K E$599.2Q1
S$203: E$600.CLOCK E$614.CLOCK E$623.CLOCK
S$204: E$499.A E$572.A E$618.P$3
S$205: E$514.A E$563.A E$617.P$3
S$206: E$529.A E$560.A E$619.P$3
S$207: E$513.K E$568.K
S$208: E$600.Q10
S$209: E$528.A E$530.A E$620.P$3
S$210: E$509.A E$534.A E$621.P$3
S$211: E$575.K E$583.K E$613.VCC
S$213: E$503.K E$543.K E$599.1Q
S$214: E$499.K E$534.K E$599.4Q
S$216: E$614.Q8 E$624.1
S$218: E$623.Q11
S$219: E$621.P$2
S$220: E$620.P$2
S$221: E$619.P$2
S$222: E$617.P$2
S$223: E$599.OE E$600.Q4
S$224: E$599.GND
S$225: E$599.2!R E$599.2!S
S$226: E$502.K E$538.K E$599.4!R
S$227: E$600.Q9 E$603.IN1
S$228: E$623.Q10
S$229: E$623.Q9
S$230: E$623.Q8
S$231: E$623.Q7
S$232: E$600.Q7 E$630.IN2
S$233: E$600.Q8
S$234: E$600.Q0 E$614.Q0 E$623.Q0
S$235: E$500.K E$533.K E$599.VCC
S$236: E$600.RESET E$614.RESET E$623.RESET
S$237: E$618.P$2
S$238: E$614.Q7
S$239: E$614.Q9
S$240: E$614.Q10 E$627.1
S$241: E$510.K E$571.K E$613.2Q
S$242: E$511.K E$570.K E$613.3Q
S$243: E$512.K E$569.K E$613.3!S
S$244: E$613.3!R
S$245: E$600.Q11 E$611.IN1
S$246: E$578.K E$586.K E$613.1Q
S$247: E$577.K E$585.K E$613.4!R
S$248: E$576.K E$584.K E$613.4!S
S$250: E$614.Q11 E$615.1
S$251: E$5.IN1 E$6.IN1 E$599.1!S E$600.VCC E$604.IN2 E$605.IN2 E$607.IN1 E$609.IN2 E$613.1!S E$614.VCC E$615.2 E$623.Q4 E$623.VCC E$627.2 E$631.IN2
S$252: E$574.K E$582.K
S$253: E$629.IN1
S$254: E$630.IN1
S$255: E$611.IN2
S$256: E$603.IN2
S$257: E$606.IN2
S$259: E$628.IN2

## Tracks (layer width: path | path; a pad name or v marks a point on that pad's centre or on a via)
GND  (via drill 0.6)
  Top 1.93: E$600.GND E$600.Q2 E$599.NC 25.4,38.1 | E$623.Q2 E$623.GND 2.54,68.58 2.54,38.1 20.32,38.1 | 20.32,38.1 25.4,38.1 | 20.32,38.1 E$599.1!R | E$614.GND E$614.Q2 E$613.NC 55.88,50.8 55.88,45.72 | 55.88,45.72 E$613.1!R | 55.88,45.72 E$616.IN2 50.8,27.94 50.8,25.4 45.72,25.4 v45.72,30.48 35.56,30.48 30.48,35.56 30.48,38.1 25.4,38.1
  pour Top (isolate 0.305, no thermals): 0,72.39 0,-2.54 93.98,-2.54 93.98,73.66 92.71,74.93 2.54,74.93
S$1  (via drill 0.6)
  other vias: 66.04,68.58
S$2  (via drill 0.6)
  other vias: 50.8,5.08
S$3  (via drill 0.6)
  Top 1.93: E$613.4Q 55.88,53.34 v55.88,55.88
  Bottom 1.93: v55.88,55.88 v66.04,66.04 68.58,66.04
S$4  (via drill 0.6)
  Top 1.27: E$537.K E$501.K
  Top 1.93: v25.4,33.02 E$599.4!S | E$501.K v38.1,25.4
  Bottom 1.93: v38.1,25.4 v25.4,33.02
  other vias: 25.4,35.56 38.1,22.86
S$5  (via drill 0.6)
  other vias: 45.72,5.08
S$6  (via drill 0.6)
  other vias: 40.64,5.08
S$7  (via drill 0.6)
  other vias: 35.56,5.08
S$8  (via drill 0.6)
  other vias: 30.48,5.08
S$9  (via drill 0.6)
  other vias: 25.4,5.08
S$10  (via drill 0.6)
  other vias: 20.32,5.08
S$11  (via drill 0.6)
  other vias: 15.24,5.08
S$12  (via drill 0.6)
  other vias: 10.16,5.08
S$13  (via drill 0.6)
  other vias: 5.08,5.08
S$14  (via drill 0.6)
  other vias: 50.8,10.16
S$15  (via drill 0.6)
  other vias: 45.72,10.16
S$16  (via drill 0.6)
  other vias: 40.64,10.16
S$17  (via drill 0.6)
  other vias: 35.56,10.16
S$18  (via drill 0.6)
  other vias: 30.48,10.16
S$19  (via drill 0.6)
  other vias: 25.4,10.16
S$20  (via drill 0.6)
  other vias: 20.32,10.16
S$21  (via drill 0.6)
  other vias: 15.24,10.16
S$22  (via drill 0.6)
  other vias: 10.16,10.16
S$23  (via drill 0.6)
  other vias: 5.08,10.16
S$24  (via drill 0.6)
  other vias: 5.08,15.24
S$25  (via drill 0.6)
  other vias: 10.16,15.24
S$26  (via drill 0.6)
  other vias: 15.24,15.24
S$27  (via drill 0.6)
  other vias: 20.32,15.24
S$28  (via drill 0.6)
  other vias: 25.4,15.24
S$29  (via drill 0.6)
  other vias: 30.48,15.24
S$30  (via drill 0.6)
  other vias: 35.56,15.24
S$31  (via drill 0.6)
  other vias: 40.64,15.24
S$32  (via drill 0.6)
  other vias: 45.72,15.24
S$33  (via drill 0.6)
  other vias: 50.8,15.24
S$34  (via drill 0.6)
  other vias: 50.8,20.32
S$35  (via drill 0.6)
  other vias: 45.72,20.32
S$36  (via drill 0.6)
  other vias: 40.64,20.32
S$37  (via drill 0.6)
  other vias: 35.56,20.32
S$38  (via drill 0.6)
  other vias: 30.48,20.32
S$39  (via drill 0.6)
  other vias: 25.4,20.32
S$40  (via drill 0.6)
  other vias: 20.32,20.32
S$41  (via drill 0.6)
  other vias: 15.24,20.32
S$42  (via drill 0.6)
  other vias: 10.16,20.32
S$43  (via drill 0.6)
  other vias: 5.08,20.32
S$44  (via drill 0.6)
  other vias: 40.64,25.4
S$45  (via drill 0.6)
  other vias: 35.56,25.4
S$46  (via drill 0.6)
  other vias: 86.36,66.04
S$47  (via drill 0.6)
  other vias: 86.36,60.96
S$48  (via drill 0.6)
  other vias: 86.36,55.88
S$49  (via drill 0.6)
  other vias: 86.36,50.8
S$50  (via drill 0.6)
  other vias: 86.36,45.72
S$51  (via drill 0.6)
  other vias: 86.36,40.64
S$52  (via drill 0.6)
  other vias: 86.36,35.56
S$53  (via drill 0.6)
  other vias: 86.36,30.48
S$54  (via drill 0.6)
  other vias: 86.36,25.4
S$55  (via drill 0.6)
  other vias: 81.28,66.04
S$56  (via drill 0.6)
  other vias: 81.28,60.96
S$57  (via drill 0.6)
  other vias: 81.28,55.88
S$58  (via drill 0.6)
  other vias: 81.28,50.8
S$59  (via drill 0.6)
  other vias: 81.28,45.72
S$60  (via drill 0.6)
  other vias: 81.28,40.64
S$61  (via drill 0.6)
  other vias: 81.28,35.56
S$62  (via drill 0.6)
  other vias: 81.28,30.48
S$63  (via drill 0.6)
  other vias: 81.28,25.4
S$64  (via drill 0.6)
  other vias: 76.2,66.04
S$65  (via drill 0.6)
  other vias: 76.2,60.96
S$66  (via drill 0.6)
  other vias: 76.2,55.88
S$67  (via drill 0.6)
  other vias: 76.2,50.8
S$68  (via drill 0.6)
  other vias: 76.2,45.72
S$69  (via drill 0.6)
  other vias: 76.2,40.64
S$70  (via drill 0.6)
  other vias: 76.2,35.56
S$71  (via drill 0.6)
  other vias: 76.2,30.48
S$72  (via drill 0.6)
  other vias: 76.2,25.4
S$73  (via drill 0.6)
  other vias: 71.12,25.4
S$74  (via drill 0.6)
  other vias: 71.12,30.48
S$75  (via drill 0.6)
  other vias: 71.12,35.56
S$76  (via drill 0.6)
  other vias: 71.12,40.64
S$77  (via drill 0.6)
  other vias: 71.12,45.72
S$78  (via drill 0.6)
  other vias: 71.12,50.8
S$79  (via drill 0.6)
  other vias: 71.12,55.88
S$80  (via drill 0.6)
  other vias: 71.12,60.96
S$81  (via drill 0.6)
  other vias: 71.12,66.04
S$82  (via drill 0.6)
  other vias: 71.12,20.32
S$83  (via drill 0.6)
  other vias: 76.2,20.32
S$84  (via drill 0.6)
  other vias: 81.28,20.32
S$85  (via drill 0.6)
  other vias: 86.36,20.32
S$193
  Top 1.93: E$614.Q4 E$613.OE
S$194
  Top 1.93: E$613.2!R E$613.2!S 53.34,38.1 53.34,30.48
S$195  (via drill 0.6)
  Top 1.27: E$572.K E$509.K
  Top 1.93: E$572.K v66.04,25.4 E$613.2Q1
S$196
  Top 1.93: 48.26,30.48 48.26,35.56 E$613.GND | 48.26,30.48 50.8,30.48 | E$616.IN1 48.26,30.48
S$198
  Top 1.27: E$544.K E$504.K
  Top 1.93: E$504.K 17.78,27.94 E$599.3!R
S$199
  Top 1.27: E$549.K E$505.K
  Top 1.93: E$505.K 15.24,25.4 E$599.3!S
S$200
  Top 1.27: E$550.K E$506.K
  Top 1.93: E$506.K E$599.3Q
S$201  (via drill 0.6)
  Top 1.27: E$555.K E$507.K
  Top 1.93: E$507.K v10.16,25.4 E$599.2Q
S$202  (via drill 0.6)
  Top 1.27: E$573.K E$508.K
  Top 1.93: E$508.K v5.08,25.4 7.62,27.94 E$599.2Q1
S$203
  Top 1.93: E$614.CLOCK 43.18,53.34 43.18,58.42 | 43.18,58.42 E$623.CLOCK | 43.18,58.42 30.48,58.42 30.48,55.88 27.94,55.88 E$600.CLOCK
S$204
  Top 1.93: E$499.A 53.34,22.86 | 53.34,22.86 E$618.P$3 | 53.34,22.86 63.5,22.86 66.04,20.32 E$572.A
S$205
  Top 1.93: 53.34,17.78 E$617.P$3 | 53.34,17.78 71.12,17.78 E$563.A | E$514.A 53.34,17.78
S$206
  Top 1.93: 53.34,12.7 E$619.P$3 | 53.34,12.7 71.12,12.7 E$560.A | E$529.A 53.34,12.7
S$207
  Top 1.27: E$568.K E$513.K
S$208
  Top 1.93: E$600.Q10 15.24,60.96
S$209
  Top 1.93: 53.34,7.62 E$620.P$3 | E$530.A 53.34,7.62 | 53.34,7.62 71.12,7.62 E$528.A
S$210
  Top 1.93: 53.34,2.54 E$621.P$3 | E$534.A 53.34,2.54 | 53.34,2.54 71.12,2.54 E$509.A
S$211  (via drill 0.6)
  Top 1.27: E$583.K E$575.K
  Top 1.93: E$613.VCC v66.04,60.96 E$583.K
S$213  (via drill 0.6)
  Top 1.27: E$543.K E$503.K
  Top 1.93: E$503.K v25.4,25.4 20.32,30.48 E$599.1Q
S$214  (via drill 0.6)
  Top 1.27: E$534.K E$499.K
  Top 1.93: v30.48,40.64 E$599.4Q
  Bottom 1.93: E$499.K v30.48,40.64
S$215  (via drill 0.6)
  Top 1.93: 38.1,35.56 v40.64,35.56
S$216
  Top 1.93: E$624.1 E$614.Q8
S$218  (via drill 0.6)
  Top 1.93: E$623.Q11 v60.96,68.58
  other vias: 58.42,68.58
S$219  (via drill 0.6)
  Top 1.93: E$621.P$2 v60.96,5.08
S$220  (via drill 0.6)
  Top 1.93: E$620.P$2 v60.96,10.16
S$221  (via drill 0.6)
  Top 1.93: E$619.P$2 v60.96,15.24
S$222  (via drill 0.6)
  Top 1.93: E$617.P$2 v60.96,20.32
S$223
  Top 1.93: E$599.OE E$600.Q4
S$224
  Top 1.93: E$599.GND 10.16,40.64 5.08,40.64 5.08,48.26
S$225
  Top 1.93: 10.16,48.26 15.24,48.26 E$599.2!R E$599.2!S
S$226  (via drill 0.6)
  Top 1.27: E$538.K E$502.K
  Top 1.93: E$502.K v30.48,25.4 22.86,33.02 E$599.4!R
S$227
  Top 1.93: E$600.Q9 E$603.IN1
S$228  (via drill 0.6)
  Top 1.93: v55.88,58.42 E$623.Q10
S$229  (via drill 0.6)
  Top 1.93: v53.34,58.42 E$623.Q9
S$230  (via drill 0.6)
  Top 1.93: v48.26,58.42 E$623.Q8
S$231  (via drill 0.6)
  Top 1.93: v50.8,58.42 E$623.Q7
S$232
  Top 1.93: E$600.Q7 E$630.IN2
S$233
  Top 1.93: E$600.Q8 22.86,60.96
S$234  (via drill 0.6)
  Top 1.93: v35.56,60.96 E$623.Q0 | E$614.Q0 v35.56,55.88 33.02,55.88 33.02,53.34 E$600.Q0
  Bottom 1.93: v35.56,55.88 v35.56,60.96
S$235
  Top 1.27: E$533.K E$500.K
  Top 1.93: E$599.VCC 27.94,33.02 33.02,27.94 40.64,27.94 43.18,25.4 E$500.K
S$236
  Top 1.93: E$600.RESET 25.4,50.8 E$614.RESET 45.72,50.8 E$623.RESET
S$237  (via drill 0.6)
  Top 1.93: E$618.P$2 v60.96,25.4
S$238
  Top 1.93: 38.1,45.72 E$614.Q7
S$239
  Top 1.93: 38.1,43.18 E$614.Q9
S$240
  Top 1.93: E$627.1 E$614.Q10
S$241  (via drill 0.6)
  Top 1.27: E$571.K E$510.K
  Top 1.93: E$613.2Q 60.96,35.56 v66.04,30.48 E$571.K
S$242  (via drill 0.6)
  Top 1.27: E$570.K E$511.K
  Top 1.93: E$613.3Q 63.5,38.1 v66.04,35.56 E$570.K
S$243  (via drill 0.6)
  Top 1.27: E$569.K E$512.K
  Top 1.93: E$613.3!S v66.04,40.64 E$569.K
S$244
  Top 1.93: E$613.3!R 68.58,43.18
S$245
  Top 1.93: E$600.Q11 7.62,45.72 7.62,50.8 E$611.IN1
S$246  (via drill 0.6)
  Top 1.27: E$586.K E$578.K
  Top 1.93: E$613.1Q v64.77,45.72 66.04,45.72 E$586.K
S$247  (via drill 0.6)
  Top 1.27: E$585.K E$577.K
  Top 1.93: E$613.4!R 63.5,48.26 v66.04,50.8 E$585.K
S$248  (via drill 0.6)
  Top 1.27: E$584.K E$576.K
  Top 1.93: E$613.4!S 60.96,50.8 v66.04,55.88 E$584.K
S$250
  Top 1.93: E$614.Q11 45.72,38.1 E$615.1
S$251  (via drill 0.6)
  Top 1.93: E$613.1!S 43.18,48.26 43.18,38.1 | 43.18,38.1 E$614.VCC 33.02,38.1 E$627.2 33.02,48.26 22.86,48.26 | 43.18,38.1 E$615.2 v43.18,33.02 | E$623.VCC 58.42,66.04 53.34,66.04 | 25.4,58.42 E$609.IN2 | 53.34,66.04 E$623.Q4 | 25.4,66.04 33.02,66.04 | 33.02,66.04 35.56,66.04 | 35.56,66.04 53.34,66.04 | 25.4,66.04 25.4,58.42 | 25.4,66.04 12.7,66.04 12.7,58.42 | 22.86,48.26 22.86,50.8 12.7,50.8 E$600.VCC 12.7,55.88 | 22.86,48.26 E$599.1!S | 12.7,58.42 12.7,55.88 | 12.7,58.42 E$604.IN2 E$631.IN2 | 12.7,55.88 E$605.IN2 | 25.4,58.42 E$607.IN1 | 33.02,66.04 E$6.IN1 | 35.56,66.04 E$5.IN1
S$252
  Top 1.27: E$582.K E$574.K
S$253  (via drill 0.6)
  Top 1.93: E$629.IN1 v33.02,60.96
S$254  (via drill 0.6)
  Top 1.93: E$630.IN1 v30.48,63.5
S$255  (via drill 0.6)
  Top 1.93: E$611.IN2 v5.08,60.96
S$256  (via drill 0.6)
  Top 1.93: E$603.IN2 v10.16,66.04
S$257  (via drill 0.6)
  Top 1.93: E$606.IN2 v7.62,63.5
S$259  (via drill 0.6)
  Top 1.93: v35.56,53.34 E$628.IN2

## Text on the board
tPlace: D | S | G | D | S | G | D | S | G | D | S | G | D | S | G